# Allegro board CUITBIKE_V1.1_MSP430.brd
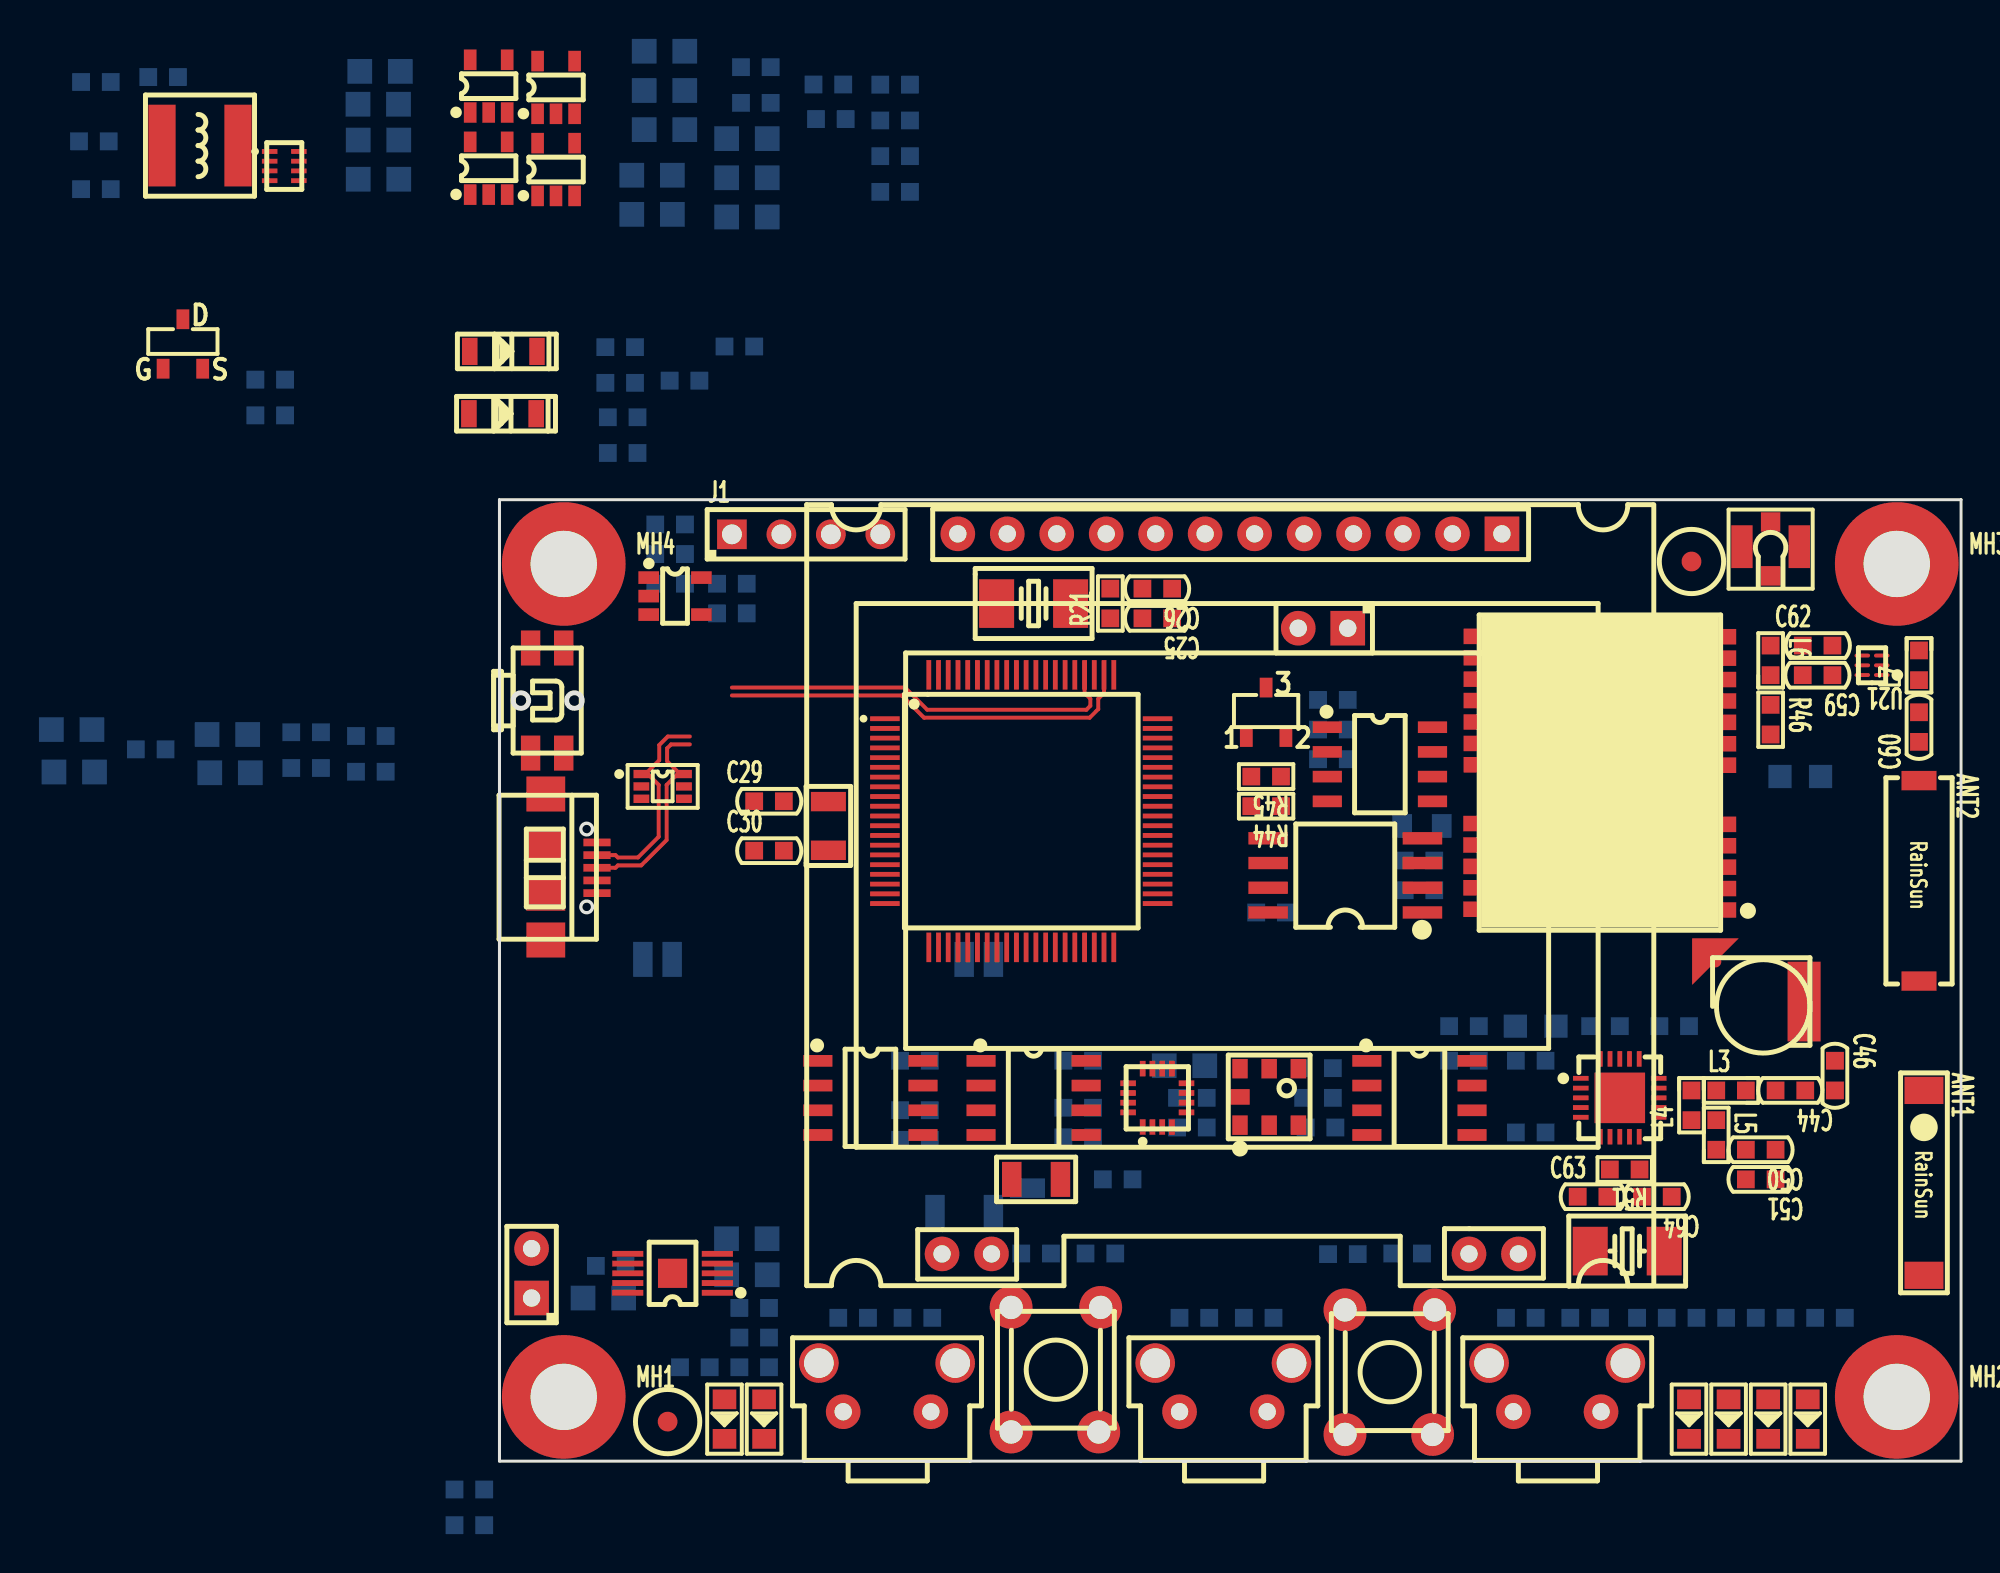
[diagram p0: board, top side]
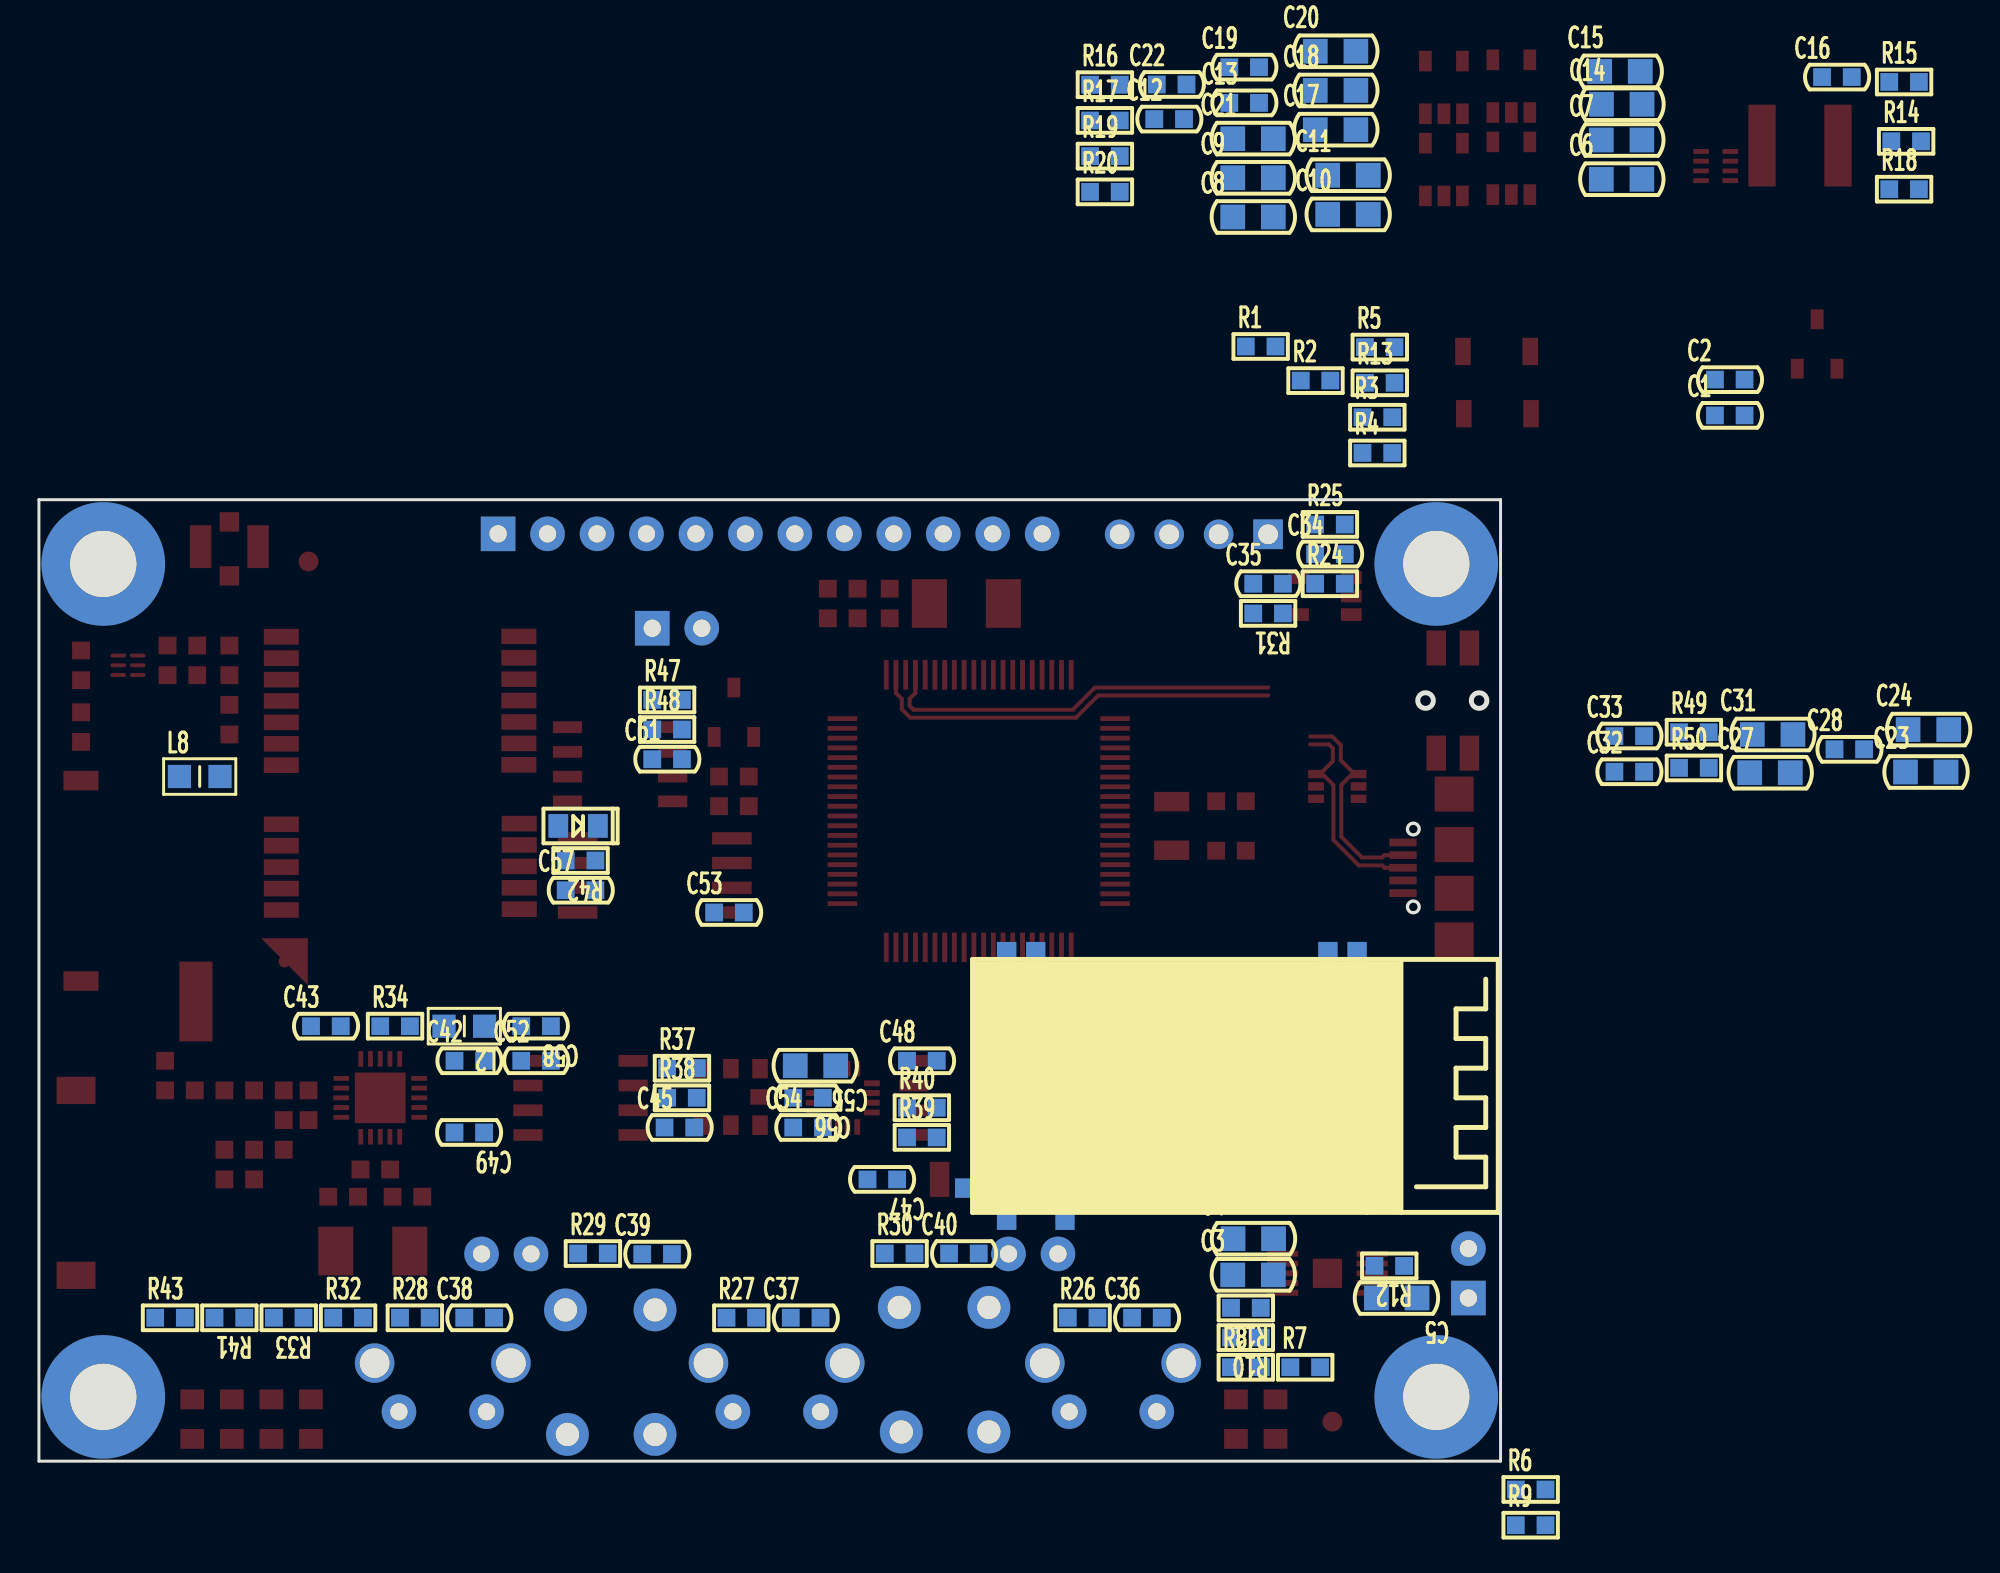
[diagram p1: board, bottom side, seen from below]

Outline 75.06 x 49.4 mm; copper layers: TOP, BOTTOM. Coordinates in mm from the lower left corner of the outline.
Outline path: 0,49.4 75.06,49.4 75.06,0 0,0 0,49.4

## Design rules (mm)
net group DP1: nets DM DP
net group DP2: nets D+ D-

## Placement (name value [footprint] x y rotation side)
ANT1  -  [AN9520-245]  73.15 19.05 270 top
ANT2  GPS1003-1575  [AN1003-1575]  72.9 29.72 270 top
B1  BEEP_HC12085P  [HEADER2X1_2R54]  43.56 42.8 180 top
BAT1  BATTERY  [HEADER2X1_2R54]  1.65 8.38 90 top
C1  10pF_50V  [CC0603]  -11.77 53.74 180 bottom
C2  10pF_50V  [CC0603]  -11.77 55.57 180 bottom
C3  10uF_25V  [CC0805]  12.71 9.57 180 bottom
C4  10uF_25V  [CC0805]  12.7 11.43 180 bottom
C5  10uF_25V  [CC0805]  5.33 8.38 0 bottom
C6  10uF_25V  [CC0805]  -6.21 65.87 180 bottom
C7  10uF_25V  [CC0805]  -6.21 67.89 180 bottom
C8  10uF_25V  [CC0805]  12.71 63.93 180 bottom
C9  10uF_25V  [CC0805]  12.71 65.94 180 bottom
C10  10uF_25V  [CC0805]  7.84 64.06 180 bottom
C11  10uF_25V  [CC0805]  7.84 66.08 180 bottom
C12  22nF_50V  [CC0603]  17.02 68.96 180 bottom
C13  22nF_50V  [CC0603]  13.17 69.79 180 bottom
C14  10uF_25V  [CC0805]  -6.22 69.72 180 bottom
C15  10uF_25V  [CC0805]  -6.13 71.41 180 bottom
C16  0.1uF_50V  [CC0603]  -17.27 71.12 180 bottom
C17  10uF_25V  [CC0805]  8.47 68.42 180 bottom
C18  10uF_25V  [CC0805]  8.47 70.43 180 bottom
C19  22nF_50V  [CC0603]  13.17 71.63 180 bottom
C20  10uF_25V  [CC0805]  8.47 72.44 180 bottom
C21  10uF_25V  [CC0805]  12.71 67.96 180 bottom
C22  22nF_50V  [CC0603]  16.89 70.74 180 bottom
C23  10uF_25V  [CC0805]  -21.84 35.41 180 bottom
C24  10uF_25V  [CC0805]  -21.97 37.59 180 bottom
C25  20pF_50V  [CC0603]  33.78 43.31 180 top
C26  20pF_50V  [CC0603]  33.78 44.83 180 top
C27  10uF_25V  [CC0805]  -13.83 35.37 180 bottom
C28  0.1uF_50V  [CC0603]  -17.91 36.58 180 bottom
C29  12pF_50V  [CC0603]  13.84 33.91 0 top
C30  12pF_50V  [CC0603]  13.84 31.37 0 top
C31  10uF_25V  [CC0805]  -13.97 37.34 180 bottom
C32  0.1uF_50V  [CC0603]  -6.61 35.42 180 bottom
C33  0.1uF_50V  [CC0603]  -6.61 37.26 180 bottom
C34  1nF_50V  [CC0603]  8.76 46.61 180 bottom
C35  0.1uF_50V  [CC0603]  11.94 45.09 180 bottom
C36  0.1uF_50V  [CC0603]  18.16 7.37 180 bottom
C37  0.1uF_50V  [CC0603]  35.69 7.37 180 bottom
C38  0.1uF_50V  [CC0603]  52.45 7.37 180 bottom
C39  0.1uF_50V  [CC0603]  43.31 10.64 180 bottom
C40  0.1uF_50V  [CC0603]  27.56 10.67 180 bottom
C41  0.1uF_50V  [CC0603]  21.34 20.57 180 bottom
C42  0.1uF_50V  [CC0603]  52.96 20.57 180 bottom
C43  0.1uF_50V  [CC0603]  60.33 22.35 180 bottom
C44  1.5pF_50V  [CC0603]  66.29 19.05 180 top
C45  0.1uF_50V  [CC0603]  42.16 17.14 180 bottom
C46  1pF_50V  [CC0603]  68.58 19.81 270 top
C47  12pF_50V  [CC0603]  31.75 14.48 0 bottom
C48  0.1uF_50V  [CC0603]  29.72 20.57 180 bottom
C49  0.1uF_50V  [CC0603]  52.96 16.89 0 bottom
C50  2.2nF_50V  [CC0603]  64.77 16 180 top
C51  4.7pF_50V  [CC0603]  64.77 14.48 180 top
C52  0.1uF_50V  [CC0603]  49.53 20.57 180 bottom
C53  0.1uF_50V  [CC0603]  39.62 28.19 180 bottom
C54  0.1uF_50V  [CC0603]  35.56 17.14 180 bottom
C55  10uF_25V  [CC0805]  35.18 20.32 0 bottom
C56  220nF_50V  [CC0603]  35.56 18.67 0 bottom
C57  0.1uF_50V  [CC0603]  47.24 29.34 180 bottom
C58  0.1uF_50V  [CC0603]  49.53 22.35 0 bottom
C59  8.2pF_50V  [CC0603]  67.69 40.39 180 top
C60  470pF_50V  [CC0603]  72.9 37.72 90 top
C61  0.1uF_50V  [CC0603]  42.8 36.07 180 bottom
C62  0.1uF_50V  [CC0603]  67.69 41.91 0 top
C63  20pF_50V  [CC0603]  56.13 13.59 0 top
C64  20pF_50V  [CC0603]  59.44 13.59 180 top
D1  LED_RED  [LED0805]  11.56 2.16 270 top
D2  LED_GREEN  [LED0805]  13.59 2.16 270 top
D3  LMBR120FT1G_SOD-123  [SOD-123]  -1.4 57.02 0 top
D4  LMBR120FT1G_SOD-123  [SOD-123]  -1.44 53.82 0 top
D5  LED_RED  [LED0805]  61.09 2.16 270 top
D6  LED_RED  [LED0805]  63.12 2.16 270 top
D7  LED_RED  [LED0805]  65.15 2.16 270 top
D8  LED_RED  [LED0805]  67.18 2.16 270 top
D9  RLS4148  [0805F]  47.37 32.64 180 bottom
IPX1  IPEX  [IPEX3]  65.28 46.99 0 top
J1  -  [HEADER4X1_2R54]  11.94 47.62 0 top
L1  SWPA5020S1R5MT  [L5020]  -15.38 67.6 0 top
L2  BEAD_BLM21PG600  [LC0805]  53.21 22.35 0 bottom
L3  3.9nH  [LC0603]  63.25 19.05 0 top
L4  8.2nH  [LC0603]  61.21 18.29 90 top
L5  2.7nH  [LC0603]  62.48 16.76 270 top
L6  27nH  [LC0603]  65.28 41.15 270 top
L7  6.8nH  [LC0603]  72.9 40.89 90 top
L8  BEAD_BLM21PG600  [LC0805]  66.8 35.18 180 bottom
MH1  Hold  [HOLD250D134]  3.3 3.3 0 top
MH2  Hold  [HOLD250D134]  71.75 3.3 0 top
MH3  Hold  [HOLD250D134]  71.75 46.1 0 top
MH4  Hold  [HOLD250D134]  3.3 46.1 0 top
MP1  MarkPoint  [MARKPOINT_R3]  8.64 2.03 0 top
MP2  MarkPoint  [MARKPOINT_R3]  61.21 46.23 0 top
NOREF  -  []  3.3 0 90 top
NOREF#2  -  []  0 3.3 0 top
Q1  AO3401A_SOT23_PMOS  [SOT23_GSD]  -16.26 57.4 0 top
Q2  S8050_SOT23_NPN  [SOT23_123]  39.37 38.48 0 top
R1  1M  [RC0603]  12.32 57.28 180 bottom
R2  1.5K  [RC0603]  9.5 55.52 180 bottom
R3  27R  [RC0603]  6.33 53.64 180 bottom
R4  27R  [RC0603]  6.33 51.8 180 bottom
R5  10K  [RC0603]  6.2 57.24 180 bottom
R6  200K  [RC0603]  -1.55 -1.45 180 bottom
R7  1.5K  [RC0603]  10.03 4.83 180 bottom
R8  1.5K  [RC0603]  13.08 4.83 180 bottom
R9  200K  [RC0603]  -1.55 -3.29 180 bottom
R10  1K  [RC0603]  13.08 6.35 0 bottom
R11  2K  [RC0603]  13.08 7.87 0 bottom
R12  10K  [RC0603]  5.71 10.03 0 bottom
R13  1K00  [RC0603]  6.2 55.41 180 bottom
R14  0R  [RC0603]  -20.83 67.82 180 bottom
R15  200K  [RC0603]  -20.72 70.87 180 bottom
R16  10K  [RC0603]  20.32 70.73 180 bottom
R17  10K  [RC0603]  20.32 68.89 180 bottom
R18  44.2K  [RC0603]  -20.72 65.36 180 bottom
R19  10K  [RC0603]  20.32 67.06 180 bottom
R20  10K  [RC0603]  20.32 65.22 180 bottom
R21  1M  [RC0603]  31.37 44.07 90 top
R24  10K  [RC0603]  8.76 45.09 180 bottom
R25  47K  [RC0603]  8.76 48.13 180 bottom
R26  10K  [RC0603]  21.46 7.37 180 bottom
R27  10K  [RC0603]  38.99 7.37 180 bottom
R28  10K  [RC0603]  55.75 7.37 180 bottom
R29  10K  [RC0603]  46.61 10.67 180 bottom
R30  10K  [RC0603]  30.86 10.67 180 bottom
R31  0R  [RC0603]  11.94 43.56 0 bottom
R32  1K  [RC0603]  59.18 7.37 180 bottom
R33  1K  [RC0603]  62.23 7.37 0 bottom
R34  22K  [RC0603]  56.77 22.35 180 bottom
R35  4.7K  [RC0603]  21.34 18.03 180 bottom
R36  4.7K  [RC0603]  21.34 16.51 180 bottom
R37  4.7K  [RC0603]  42.04 20.19 180 bottom
R38  4.7K  [RC0603]  42.04 18.67 180 bottom
R39  4.7K  [RC0603]  29.72 16.64 180 bottom
R40  4.7K  [RC0603]  29.72 18.16 180 bottom
R41  510R  [RC0603]  65.28 7.37 0 bottom
R42  120R  [RC0603]  47.24 30.86 0 bottom
R43  510R  [RC0603]  68.33 7.37 180 bottom
R44  510R  [RC0603]  39.37 33.66 180 top
R45  510R  [RC0603]  39.37 35.18 180 top
R46  10R  [RC0603]  65.28 38.1 270 top
R47  1K  [RC0603]  42.8 39.12 180 bottom
R48  10K  [RC0603]  42.8 37.59 180 bottom
R49  0R  [RC0603]  -9.93 37.45 180 bottom
R50  0R  [RC0603]  -9.93 35.62 180 bottom
R51  1M  [RC0603]  57.78 14.99 180 top
SW1  SW-6X6x6-L  [SW-6X6X6-L]  17.65 2.54 0 top
SW2  SW-6X6x6-L  [SW-6X6X6-L]  34.92 2.54 0 top
SW3  SW-6X6x6-L  [SW-6X6X6-L]  52.07 2.54 0 top
SW4  SW-6X6x6  [SW-6X6X6]  45.72 4.57 0 top
SW5  SW-6X6x6  [SW-6X6X6]  28.57 4.7 0 top
SW6  SW-4P-5R4x4R5  [SW-4P-5R4X4R5]  3.3 41.78 270 top
U1  NUP4202W1T2G  [SC-88]  8.38 34.67 0 top
U2  BQ24090DGQR  [HVSSOP-10]  8.89 9.65 90 top
U3  MP2162GQH-Z  [QFN-8]  -11.05 66.55 0 top
U4  RT9193-33GB  [SOT23-5]  2.91 66.37 0 top
U5  RT9193-33GB  [SOT23-5]  2.91 70.59 0 top
U6  RT9193-33GB  [SOT23-5]  -0.55 66.44 0 top
U7  RT9193-33GB  [SOT23-5]  -0.55 70.65 0 top
U8  MSP430F5529IPN  [LQFP-80]  26.8 33.4 270 top
U9  TPS3823-33DBVR  [SOT23-5]  9.02 44.45 270 top
U10  -  [BMP180]  38.03 17.27 0 top
U11  AT24C512C-SSHD-T  [SOIC8]  19.05 18.67 270 top
U12  NRF24L01P-R  [TQFN-4X4-20]  57.53 18.67 0 top
U13  TMP75AIDR  [SOIC8]  47.24 18.67 270 top
U14  PCF8563T  [SOIC8]  27.43 18.67 270 top
U15  -  [JLX12864G-086]  23.55 47.62 0 top
U16  HMC5883L  [TQFN-3X3-16]  33.78 18.67 0 top
U17  W25Q128FVSIG  [SO-8-208]  43.43 30.1 90 top
U18  HC-06  [HC-06-MINI]  7.37 25.78 270 bottom
U19  -  [NEO-6M]  62.61 28.32 180 top
U20  BATTERY_XH414  [BAT-XH414HG]  64.9 23.37 90 top
U21  MAX2659ELT+T  [UDFN-6]  70.48 40.89 180 top
U22  AT24C32D-SSHM-T  [SOIC8]  45.21 35.81 270 top
USB1  -  [USB-MICRO]  5.08 30.48 270 top
X1  XTAL_8MHz_5032  [X-2P-5R0X3R2-SMD]  27.43 44.07 0 top
X2  XTAL_32768Hz_3215  [X-2P-3R2X1R5-SMD]  16.89 32.64 90 top
X4  XTAL_32768Hz_3215  [X-2P-3R2X1R5-SMD]  27.56 14.48 180 top
X5  XTAL_16MHz_5032  [X-2P-5R0X3R2-SMD]  57.91 10.79 180 top

## Library data of the parts
ANT1 ANT2 = AN9520-245
B1 = BEEP_HC12085P
BAT1 U20 = BATTERY
C1 C2 C12 C13 C16 C19 C22 C25 C26 C28-C30 C32 C33 C36-C54 C56-C64 = CAP NP
C3-C11 C14 C15 C17 C18 C20 C21 C23 C24 C27 C31 C34 C35 C55 = CAP NP_2
D1 D2 D5-D8 = LED_4
D3 D4 = DIODE13_0
D9 = DIODE13_7
IPX1 = IPEX_1
J1 = CON4
L1 = IND_BEAD_0805_600OHM_1
L2 L8 = IND_BEAD_0805_600OHM_200MA
L3-L7 = INDUCTOR
MH1-MH4 = Hold_1
MP1 MP2 = MarkPoint
Q1 = MOS-P
Q2 = L14G1/TO_1
R1-R21 R24-R51 = R_Generic
SW1-SW6 = SWITCH-SPST-4P
U1 = nup2202w1_D_2
U2 = BQ24090
U3 = MP2162GQH-Z
U4-U7 = SPX3819M5-L-1-2
U8 = MSP430F5529
U9 = TPS3823-33_0
U10 = BMP180
U11 U22 = AT24Cxx
U12 = NRF24L01
U13 = LM75A
U14 = PCF8563
U15 = JLX12864G-086
U16 = HMC5883
U17 = W25Qxx
U18 = HC-06
U19 = NEO-6M
U21 = MAX2659ELT+T
USB1 = USB-MICRO
X1 X2 X4 X5 = XTAL_5032_0

## Footprints (pads in the part's own frame, mm; a bottom-side part is the same pattern mirrored in y, then rotated)
0805F
  rect 1.016x1.219 smd: 1(-1.016,0) 2(1.016,0)
AN1003-1575
  rect 1x1.8 smd: 1(-5.25,0) 2(5.05,0)
AN9520-245
  rect 1.4x2 smd: 1(0,0) 2(9.5,0)
BAT-XH414HG
  custom 2.4x2.4 smd: 1(2.3,2.45)
  rect 4.1x1.7 smd: 2(0.25,-2.1)
BMP180
  rect 0.8x1 smd: 1(0,0) 2(1.5,0) 3(3,0) 4(3,2.9) 5(1.5,2.9) 6(0,2.9)
  rect 1x0.8 smd: 7(0,1.45)
CC0603
  rect 0.914x0.914 smd: 1(-0.762,0) 2(0.762,0)
CC0805
  rect 1.27x1.27 smd: 1(-1.041,0) 2(1.041,0)
HC-06-MINI
  rect 1.8x1 smd: 1(0,0) 2(0,-1.5) 12(0,-16.5) 13(0,-18) 22(13,-18) 24(13,-15)
  rect 1x1.8 smd: 21(11.75,-19.75)
HEADER2X1_2R54
  rect 1.778x1.778 hole 0.889: 1(0,0)
  round 1.778 hole 0.889: 2(2.54,0)
HEADER4X1_2R54
  rect 1.524x1.524 hole 1.016: 1(0,0)
  round 1.524 hole 1.016: 2(2.54,0) 3(5.08,0) 4(7.62,0)
HOLD250D134
  round 6.35 hole 3.404: 1(0,0)
HVSSOP-10
  rect 0.3x1.6 smd: 1(-1,-2.3) 2(-0.5,-2.3) 3(0,-2.3) 4(0.5,-2.3) 5(1,-2.3) 6(1,2.3) 7(0.5,2.3) 8(0,2.3) 9(-0.5,2.3) 10(-1,2.3)
  rect 1.5x1.5 smd: 11(0,0)
IPEX3
  rect 1x1 smd: 1(0,-1.501) 3(0,1.27)
  rect 1.1x2.2 smd: 2(1.473,0) 4(-1.473,0)
JLX12864G-086
  rect 1.778x1.778 hole 0.889: 1(27.93,0.024)
  round 1.778 hole 0.889: 2(25.39,0.024) 3(22.85,0.024) 4(20.31,0.024) 5(17.77,0.024) 6(15.23,0.024) 7(12.69,0.024) 8(10.15,0.024) 9(7.61,0.024) 10(5.07,0.024) 11(2.53,0.024) 12(-0.01,0.024) 13(-0.82,-36.976) 14(1.72,-36.976) 15(26.24,-36.976) 16(28.78,-36.976)
L5020
  rect 1.4x4.2 smd: 1(-1.95,0) 2(1.95,0)
LC0603
  rect 0.914x0.914 smd: 1(-0.762,0) 2(0.762,0)
LC0805
  rect 1.194x1.194 smd: 1(-1.041,0) 2(1.041,0)
LED0805
  rect 1.016x1.219 smd: 1(-1.016,0) 2(1.016,0)
LQFP-80
  rect 0.25x1.52 smd: 1(-4.75,-7) 2(-4.25,-7) 3(-3.75,-7) 4(-3.25,-7) 5(-2.75,-7) 6(-2.25,-7) 7(-1.75,-7) 8(-1.25,-7) 9(-0.75,-7) 10(-0.25,-7) 11(0.25,-7) 12(0.75,-7) 13(1.25,-7) 14(1.75,-7) 15(2.25,-7) 16(2.75,-7) 17(3.25,-7) 18(3.75,-7) 19(4.25,-7) 20(4.75,-7) 41(4.75,7) 42(4.25,7) 43(3.75,7) 44(3.25,7) 45(2.75,7) 46(2.25,7) 47(1.75,7) 48(1.25,7) 49(0.75,7) 50(0.25,7) 51(-0.25,7) 52(-0.75,7) 53(-1.25,7) 54(-1.75,7) 55(-2.25,7) 56(-2.75,7) 57(-3.25,7) 58(-3.75,7) 59(-4.25,7) 60(-4.75,7)
  rect 1.52x0.25 smd: 21(7,-4.75) 22(7,-4.25) 23(7,-3.75) 24(7,-3.25) 25(7,-2.75) 26(7,-2.25) 27(7,-1.75) 28(7,-1.25) 29(7,-0.75) 30(7,-0.25) 31(7,0.25) 32(7,0.75) 33(7,1.25) 34(7,1.75) 35(7,2.25) 36(7,2.75) 37(7,3.25) 38(7,3.75) 39(7,4.25) 40(7,4.75) 61(-7,4.75) 62(-7,4.25) 63(-7,3.75) 64(-7,3.25) 65(-7,2.75) 66(-7,2.25) 67(-7,1.75) 68(-7,1.25) 69(-7,0.75) 70(-7,0.25) 71(-7,-0.25) 72(-7,-0.75) 73(-7,-1.25) 74(-7,-1.75) 75(-7,-2.25) 76(-7,-2.75) 77(-7,-3.25) 78(-7,-3.75) 79(-7,-4.25) 80(-7,-4.75)
MARKPOINT_R3
  round 1.016 smd: 1(0,0)
NEO-6M
  rect 1.8x0.8 smd: 1(0,0) 2(0,-1.1) 3(0,-2.2) 4(0,-3.3) 5(0,-4.4) 6(0,-7.44) 7(0,-8.54) 8(0,-9.64) 9(0,-10.74) 10(0,-11.84) 11(0,-12.94) 12(0,-14.04) 13(12.2,-14.06) 14(12.2,-12.96) 15(12.2,-11.86) 16(12.2,-10.76) 17(12.2,-9.66) 18(12.2,-8.56) 19(12.2,-7.46) 20(12.22,-4.44) 21(12.22,-3.34) 22(12.22,-2.24) 23(12.22,-1.14) 24(12.22,-0.04)
QFN-8
  rect 0.8x0.25 smd: 1(-0.75,0.75) 2(-0.75,0.25) 3(-0.75,-0.25) 4(-0.75,-0.75) 5(0.75,-0.75) 6(0.75,-0.25) 7(0.75,0.25) 8(0.75,0.75)
RC0603
  rect 0.914x0.914 smd: 1(-0.762,0) 2(0.762,0)
SC-88
  rect 0.813x0.432 smd: 1(-1.092,0.635) 2(-1.092,0) 3(-1.092,-0.635) 4(1.092,-0.635) 5(1.092,0) 6(1.092,0.635)
SO-8-208
  rect 0.635x2.032 smd: 1(-1.905,-3.962) 2(-0.635,-3.962) 3(0.635,-3.962) 4(1.905,-3.962) 5(1.905,3.962) 6(0.635,3.962) 7(-0.635,3.962) 8(-1.905,3.962)
SOD-123
  rect 0.8x1.4 smd: 1(-0.127,0) 2(3.327,0)
SOIC8
  rect 0.6x1.5 smd: 1(-1.9,-2.7) 2(-0.63,-2.7) 3(0.64,-2.7) 4(1.91,-2.7) 5(1.91,2.7) 6(0.64,2.7) 7(-0.63,2.7) 8(-1.9,2.7)
SOT23-5
  rect 0.65x1.06 smd: 1(-0.95,-1.354) 2(0,-1.354) 3(0.95,-1.354) 4(0.95,1.354) 5(-0.95,1.354)
SOT23_123
  rect 0.66x1.016 smd: 1(-1.016,-1.27) 2(1.016,-1.27) 3(0,1.27)
SOT23_GSD
  rect 0.66x1.016 smd: 1(-1.016,-1.27) 2(1.016,-1.27) 3(0,1.27)
SW-4P-5R4X4R5
  rect 1.8x1 smd: 1(0,0) 2(5.4,0) 3(0,-1.7) 4(5.4,-1.7)
SW-6X6X6
  round 2.2 hole 1.2: 1(-2.3,3.2) 2(-2.3,-3.2) 3(2.3,3.2) 4(2.2,-3.2)
SW-6X6X6-L
  round 2.032 hole 1.524: 1(-1.25,2.5) 4(5.75,2.5)
  round 1.778 hole 0.889: 2(0,0) 3(4.5,0)
TQFN-3X3-16
  rect 0.3x0.8 smd: 1(-0.75,-1.5) 2(-0.25,-1.5) 3(0.25,-1.5) 4(0.75,-1.5) 9(0.75,1.5) 10(0.25,1.5) 11(-0.25,1.5) 12(-0.75,1.5)
  rect 0.8x0.3 smd: 5(1.5,-0.75) 6(1.5,-0.25) 7(1.5,0.25) 8(1.5,0.75) 13(-1.5,0.75) 14(-1.5,0.25) 15(-1.5,-0.25) 16(-1.5,-0.75)
TQFN-4X4-20
  rect 0.8x0.25 smd: 1(-2,1) 2(-2,0.5) 3(-2,0) 4(-2,-0.5) 5(-2,-1) 11(2,-1) 12(2,-0.5) 13(2,0) 14(2,0.5) 15(2,1)
  rect 0.25x0.8 smd: 6(-1,-2) 7(-0.5,-2) 8(0,-2) 9(0.5,-2) 10(1,-2) 16(1,2) 17(0.5,2) 18(0,2) 19(-0.5,2) 20(-1,2)
  rect 2.6x2.6 smd: 21(0,0)
UDFN-6
  oval 0.8x0.2 smd: 1(-0.5,0.5) 2(-0.5,0) 3(-0.5,-0.5) 4(0.5,-0.5) 5(0.5,0) 6(0.5,0.5)
USB-MICRO
  rect 0.4x1.4 smd: 1(-1.31,-0.07) 2(-0.66,-0.07) 3(-0.01,-0.07) 4(0.64,-0.07) 5(1.29,-0.07)
  rect 1.8x2 smd: 6(-3.8,-2.7) 7(-1.2,-2.7) 8(1.3,-2.7) 9(3.7,-2.7)
X-2P-3R2X1R5-SMD
  rect 1x1.8 smd: 1(-1.25,0) 2(1.25,0)
X-2P-5R0X3R2-SMD
  rect 1.8x2.5 smd: 1(-1.9,0) 2(1.9,0)

## Nets
AVCC: C32.2 R49.1 U8.11(AVCC1)
GND: BAT1.2 C1.1 C2.1 C3.2 C4.2 C5.2 C6.2 C7.2 C8.2 C9.2 C10.2 C11.2 C12.2 C13.2 C14.2 C15.2 C16.2 C17.2 C18.2 C19.2 C20.2 C21.2 C22.2 C23.1 C24.1 C25.1 C26.1 C27.2 C28.2 C29.1 C30.1 C31.2 C33.1 C34.1 C35.1 C36.2 C37.2 C38.2 C39.2 C40.2 C41.2 C42.2 C43.1 C45.1 C46.1 C47.2 C48.2 C49.1 C50.1 C51.1 C52.1 C53.2 C54.1 C55.2 C57.2 C58.1 C61.2 C62.1 C63.1 C64.1 D7.2(CATHODE) IPX1.2 IPX1.4 J1.1 MH1.1 MH2.1 MH3.1 MH4.1 Q2.2(E) R1.1 R6.1 R10.2 R11.2 R12.2 R13.2 R16.2 R17.2 R18.2 R19.2 R20.2 R34.2 R48.1 R50.2 SW1.1 SW1.3 SW1.4 SW2.1 SW2.3 SW2.4 SW3.1 SW3.3 SW3.4 SW4.3 SW4.4 SW5.3 SW5.4 SW6.3 SW6.4 U1.2 U2.3(VSS) U2.11(GND) U3.3(AGND) U3.5(PGND) U4.2(GND) U5.2(GND) U6.2(GND) U7.2(GND) U8.19(DVSS1) U8.49(DVSS2) U8.61(VSSU) U8.68(AVSS2) U9.2(GND) U10.7(GND) U11.1(A0) U11.2(A1) U11.3(A2) U11.4(GND) U11.7(WP) U12.8(VSS_1) U12.14(VSS_2) U12.17(VSS_3) U12.20(VSS_4) U12.21(GND) U13.4(GND) U13.5(A2) U13.6(A1) U13.7(A0) U14.4(VSS) U15.6(VSS) U15.13(NC_4) U15.14(NC_3) U15.15(NC_2) U15.16(NC_1) U16.9(GND_1) U16.11(GND_2) U17.4(GND) U18.13(GND_1) U18.21(GND_2) U18.22(GND_3) U19.7(VDDUSB) U19.10(GND_1) U19.12(GND_2) U19.13(GND_3) U19.24(GND_4) U20.2 U21.1(GND_1) U21.2(GND_2) U22.1(A0) U22.2(A1) U22.3(A2) U22.4(GND) U22.7(WP) USB1.5(GND) USB1.6(P_2) USB1.7(P_1) USB1.8(P_3) USB1.9(P_4)
VBAT: BAT1.1 C5.1 D3.1 Q1.3(D) R7.2 R8.2 R9.2 U2.10(OUT)
VBUS: C3.1 C4.1 D4.1 Q1.1(G) R5.2 R13.1 U2.1(IN) U8.65(VBUS) USB1.1(VBUS)
VCC1_3V3: R39.1 R40.1
VCC_3V3: C14.1 C15.1 C16.1 C28.1 C33.2 C35.2 C41.1 C53.1 C57.1 C61.1 D9.1(ANODE) J1.2 L1.2(B) L2.1(A) L8.2(B) R15.1 R24.1 R25.1 R26.1 R27.1 R28.1 R29.1 R30.1 R32.1 R33.1 R35.1 R36.1 R43.1 R49.2 U3.4(OUT) U8.18(DVCC1) U8.50(DVCC2) U9.5(VCC) U11.8(VCC) U17.3(W\P\) U17.7(H\O\L\D\) U17.8(VCC) U19.23(VCC) U22.8(VCC)
VCC_BKUP: C48.1 R42.2 U14.8(VDD) U19.22(V_BCKP) U20.1
VCC_BT: C11.1 C58.2 U4.5(VOUT) U18.12(3.3V)
VCC_IN: B1.1(P) C6.1 C7.1 C8.1 C10.1 C17.1 C20.1 D3.2 D4.2 Q1.2(S) R14.1 U3.7(VIN) U4.1(VIN) U5.1(VIN) U6.1(VIN) U7.1(VIN)
VCC_LCD: C18.1 U6.5(VOUT) U15.7(VDD)
VCC_LEDA: C21.1 U7.5(VOUT) U15.5(LEDA)
VCC_SENSOR: C9.1 C45.2 C52.2 C54.2 R37.1 R38.1 U5.5(VOUT) U10.2(VDD) U10.3(VDDIO) U13.8(VCC) U16.2(VDD) U16.4(S1) U16.13(VDDIO)
VSSA: C32.1 R50.1 U8.14(AVSS1)
12864_CS: U8.3(P6.6/CB6/A6) U15.12(CS)
12864_EN: R19.1 U6.3(EN) U8.4(P6.7/CB7/A7)
12864_LEDA_EN: R20.1 U7.3(EN) U8.78(P6.1/CB1/A1)
12864_RESET: U8.2(P6.5/CB5/A5) U15.11(RESET)
12864_ROM_CS: U8.8(P7.3/CB11/A15) U15.4(ROM_CS)
12864_ROM_IN: U8.5(P7.0/CB8/A12) U15.1(ROM_IN)
12864_ROM_OUT: U8.6(P7.1/CB9/A13) U15.2(ROM_OUT)
12864_ROM_SCK: U8.7(P7.2/CB10/A14) U15.3(ROM_SCK)
12864_RS: U8.1(P6.4/CB4/A4) U15.10(RS)
12864_SCL: U8.79(P6.2/CB2/A2) U15.8(SCLK)
12864_SDA: U8.80(P6.3/CB3/A3) U15.9(SDA)
#RESET: C34.2 J1.4 R25.2 U8.76(R\S\T\/NMI/SBWTDIO) U9.1(R\E\S\E\T\)
ADC_BAT: R6.2 R9.1 U8.77(P6.0/CB0/A1)
AT24CXX_SCL: R35.2 U8.28(P1.7/TA1.0) U11.6(SCL)
AT24CXX_SDA: R36.2 U8.27(P1.6/TA1CLK/CBOUT) U11.5(SDA)
BAT_#CHG: D1.2(CATHODE) U2.8(C\H\G\)
BAT_#PG: D2.2(CATHODE) U2.5(P\G\)
BAT_ISET2: R12.1 U2.7(ISET2) U8.56(P5.7/TB0.1)
BEEP: R47.1 U8.57(P7.4/TB0.2)
BT_EN: R17.1 U4.3(EN) U8.42(P3.5/TB0.5)
BT_LED: R41.1 U8.43(P3.6/TB0.6) U18.24(PIO1)
D+: R3.1 U1.6 USB1.3(D+)
D-: R4.1 U1.1 USB1.2(D-)
DM: C2.2 R4.2 U8.64(PU.1/DM)
DP: C1.2 R1.2 R2.1 R3.2 U8.62(PU.0/DP)
GPS_PPS: D8.2(CATHODE) U8.55(P5.6/TB0.0) U19.3(TIMEPULSE)
GPS_SCL: U19.19(SCL2) U22.6(SCL)
GPS_SDA: U19.18(SDA2) U22.5(SDA)
IIC1_SCL: R38.2 U8.33(P2.4/TA2.1) U10.5(SCL) U13.2(SCL) U16.1(SCL)
IIC1_SDA: R37.2 U8.32(P2.3/TA2.0) U10.6(SDA) U13.1(SDA) U16.16(SDA)
NRF24L01_CE: U8.35(P2.6/RTCCLK/DMAE0) U12.1(CE)
NRF24L01_CSN: U8.36(P2.7/UCB0STE/UCA0CLK) U12.2(CSN)
NRF24L01_IRQ: U8.34(P2.5/TA2.2) U12.6(IRQ)
NRF24L01_MISO: U8.38(P3.1/UCB0SOMI/UCB0SCL) U12.5(MISO)
NRF24L01_MOSI: U8.37(P3.0/UCB0SIMO/UCB0SDA) U12.4(MOSI)
NRF24L01_SCK: U8.39(P3.2/UCB0CLK/UCA0STE) U12.3(SCK)
P1.0: R31.2 U8.21(P1.0/TA0CLK/ACLK)
P1.1: C36.1 R26.2 SW1.2 U8.22(P1.1/TA0.0)
P1.2: C37.1 R27.2 SW2.2 U8.23(P1.2/TA0.1)
P1.3: C38.1 R28.2 SW3.2 U8.24(P1.3/TA0.2)
P1.4: C39.1 R29.2 SW4.1 SW4.2 U8.25(P1.4/TA0.3)
P1.5: C40.1 R30.2 SW5.1 SW5.2 U8.26(P1.5/TA0.4)
P4.6: D5.2(CATHODE) U8.53(P4.6/PM_NONE)
P4.7: D6.2(CATHODE) U8.54(P4.7/PM_NONE)
PCF8563_#INT: U8.31(P2.2/TA2CLK/SMCLK) U14.3(I\N\T\)
PCF8563_SCL: R40.2 U8.30(P2.1/TA1.2) U14.6(SCL)
PCF8563_SDA: R39.2 U8.29(P2.0/TA1.1) U14.5(SDA)
SENSOR_EN: R16.1 U5.3(EN) U8.44(P3.7/TBOUTH/SVMOUT)
TEST: J1.3 U8.71(TEST/SBWTCK)
UCA0RXD: U8.41(P3.4/UCA0RXD/UCA0SOMI) U18.1(UART_TXD)
UCA0TXD: U8.40(P3.3/UCA0TXD/UCA0SIMO) U18.2(UART_RXD)
UCA1RXD: R45.2 U8.52(P4.5/PM_UCA1RXD/PM_UCA1SOMI)
UCA1TXD: R44.2 U8.51(P4.4/PM_UCA1TXD/PM_UCA1SIMO)
USB_PUR: R2.2 U8.63(PUR)
W25QXX_#CS: U8.45(P4.0/PM_UCB1STE/PM_UCA1CLK) U17.1(C\S\)
W25QXX_SPI_CLK: U8.48(P4.3/PM_UCB1CLK/PM_UCA1STE) U17.6(CLK)
W25QXX_SPI_MISO: U8.47(P4.2/PM_UCB1SOMI/PM_UCB1SCL) U17.2(DO)
W25QXX_SPI_MOSI: U8.46(P4.1/PM_UCB1SIMO/PM_UCB1SDA) U17.5(DI)
XIN: C29.2 U8.12(P5.4/XIN) X2.2
XOUT: C30.2 U8.13(P5.5/XOUT) X2.1
XT2IN: C25.2 R21.1 U8.69(P5.2/XT2IN) X1.2
XT2OUT: C26.2 R21.2 U8.70(P5.3/XT2OUT) X1.1
N16975: C47.1 U14.1(OSCI) X4.1
N20495: R34.1 U12.16(IREF)
N20883: C63.2 R51.2 U12.9(XC2) X5.2
N20890: C64.2 R51.1 U12.10(XC1) X5.1
N21363: C42.1 C43.2 C49.2 L2.2(B) U12.7(VDD_1) U12.15(VDD_2) U12.18(VDD_3) U12.19(DVDD)
N22760: L3.1 L4.2 U12.13(ANT2)
N22769: L4.1 L5.1 U12.12(ANT1)
N22838: C50.2 C51.2 L5.2 U12.11(VDD_PA)
N23293: ANT1.1 C44.1 C46.2
N49336: C31.1 U8.20(VCORE)
N50234: C23.2 U8.67(V18)
N138675: R44.1 U19.21(RXD1)
N138679: R45.1 U19.20(TXD1)
N211268: C24.2 U8.66(VUSB)
N213516: C59.2 IPX1.1 L6.1 U19.11(RF_IN)
N227281: C44.2 L3.2
N13728785: R10.1 U2.2(ISET)
N13728792: R11.1 U2.4(PRETERM)
N13730609: R14.2 U3.1(EN)
N13730742: L1.1(A) U3.6(SW)
N13730860: R15.2 R18.1 U3.2(FB)
N13731687: D2.1(ANODE) R8.1
N13731822: D1.1(ANODE) R7.1
N16749524: R5.1 U1.5
N16751988: R24.2 SW6.1 SW6.2 U9.3(M\R\)
N16752139: R31.1 U9.4(WDI)
N16756953: C27.1 U8.9(P5.0/A8/VREF+/VEREF+)
N16761282: D5.1(ANODE) R32.2
N16761286: D6.1(ANODE) R33.2
N16762618: C56.1 U16.8(SETP)
N16762626: C56.2 U16.12(SETC)
N16762634: C55.1 U16.10(C1)
N16777984: C12.1 U5.4(BYP)
N16778902: C19.1 U6.4(BYP)
N16779252: C22.1 U7.4(BYP)
N16779614: C13.1 U4.4(BYP)
N16780565: D7.1(ANODE) R41.2
N16782209: D8.1(ANODE) R43.2
N16782513: D9.2(CATHODE) R42.1
N16783927: R46.2 U19.8(NC_2) U19.9(VCC_RF)
N16783979: L6.2 R46.1
N16784737: ANT2.1 C60.1
N16784761: C60.2 L7.1
N16784764: L7.2 U21.3(RFIN)
N16785800: C59.1 U21.6(RFOUT)
N16785818: C62.2 L8.1(A) U21.4(VCC) U21.5(S\H\D\N\)
N16789326: U14.2(OSCO) X4.2
N16798201: Q2.1(B) R47.2 R48.2
N16798223: B1.2(G) Q2.3(C)

Pads without a net: ANT1 2; ANT2 2; IPX1 3; MP1 1; MP2 1; U1 3 4; U2 6 9; U3 8; U8 10 15 16 17 58 59 60 72 73 74 75; U10 1 4; U13 3; U14 7; U16 3 5 6 7 14 15; U19 1 2 4 5 6 14 15 16 17; USB1 4

## Routing (per net, layer and track width the routed paths; a pad name or vN(x,y) marks a point on that pad's centre or on a via; arc(x,y) is an arc through that point)
D+: length 11
  TOP w0.203: USB1.3 5.96,30.49 6.08,30.61 7.28,30.61 8.59,31.92 8.59,34.75 9.14,35.31 9.27,35.31 ; 9.78,36.83 8.81,36.83 8.61,36.63 8.61,35.97 9.27,35.31 ; 9.27,35.31 U1.6
D-: length 11
  TOP w0.203: 7.49,35.31 7.62,35.31 8.18,34.75 8.18,32.09 7.11,31.02 6.08,31.02 5.96,31.14 USB1.2 ; 7.49,35.31 U1.1 ; 7.49,35.31 8.21,36.02 8.21,36.8 8.65,37.24 9.78,37.24
DM: length 20.7
  TOP w0.203: 11.94,39.75 20.83,39.75 21.97,38.61 30.14,38.61 30.34,38.81 30.34,39.18 30.05,39.47 U8.64
DP: length 21.3
  TOP w0.203: 11.94,39.34 20.66,39.34 21.8,38.2 30.31,38.2 30.75,38.64 30.75,39.18 31.05,39.47 U8.62

## Text on the board
Ref Des/Silkscreen Top: BY:XXXLZJXXX | DATE:2016_11_14 | NAME:CUITBIKE_V1.2_MSP430
